# Altium PCB esp_slave.PcbDoc
Units mm, origin at the board's own origin, x right, y up, seen from the top; angles counter-clockwise.
Board outline 91.57 x 57.91 mm, 2 copper layers (Top Layer, Bottom Layer); 54 components, 18 nets, 198 pads, 0 vias.
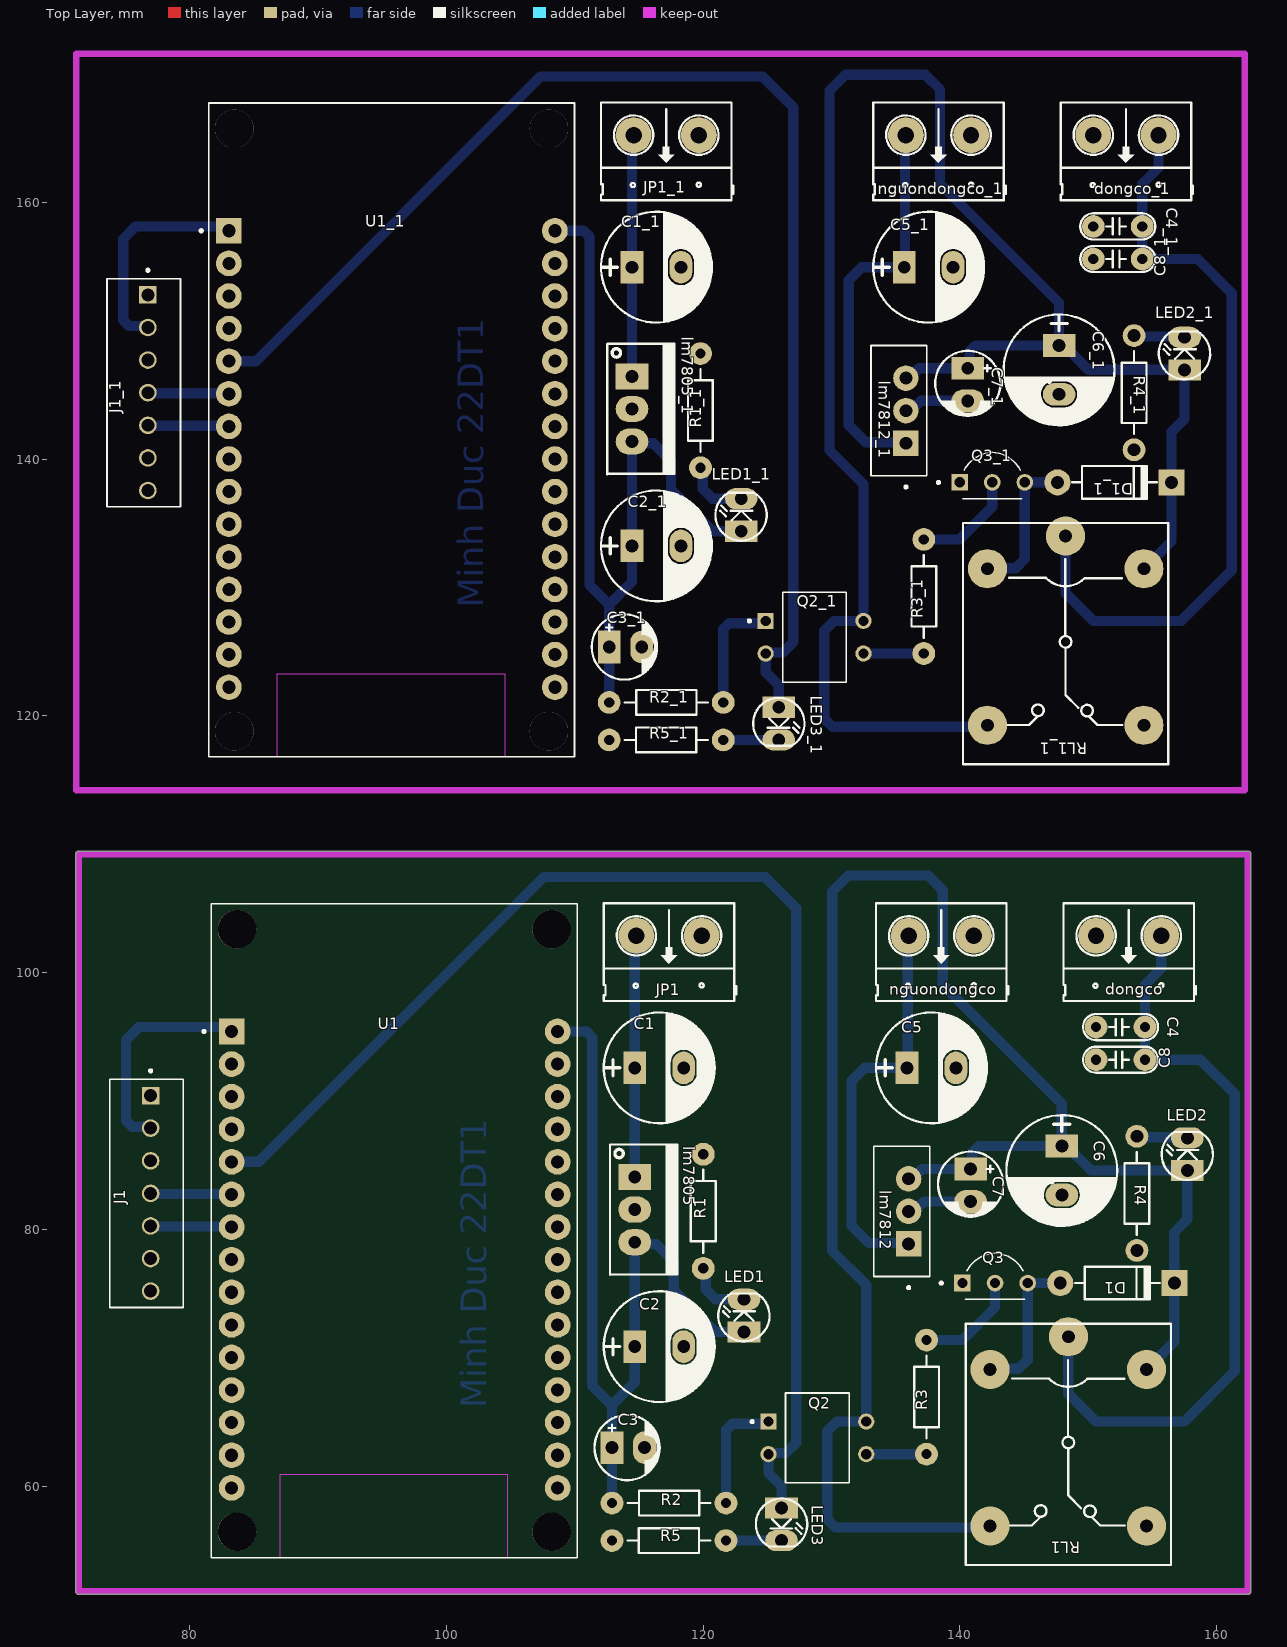
[diagram p0: Top Layer view]
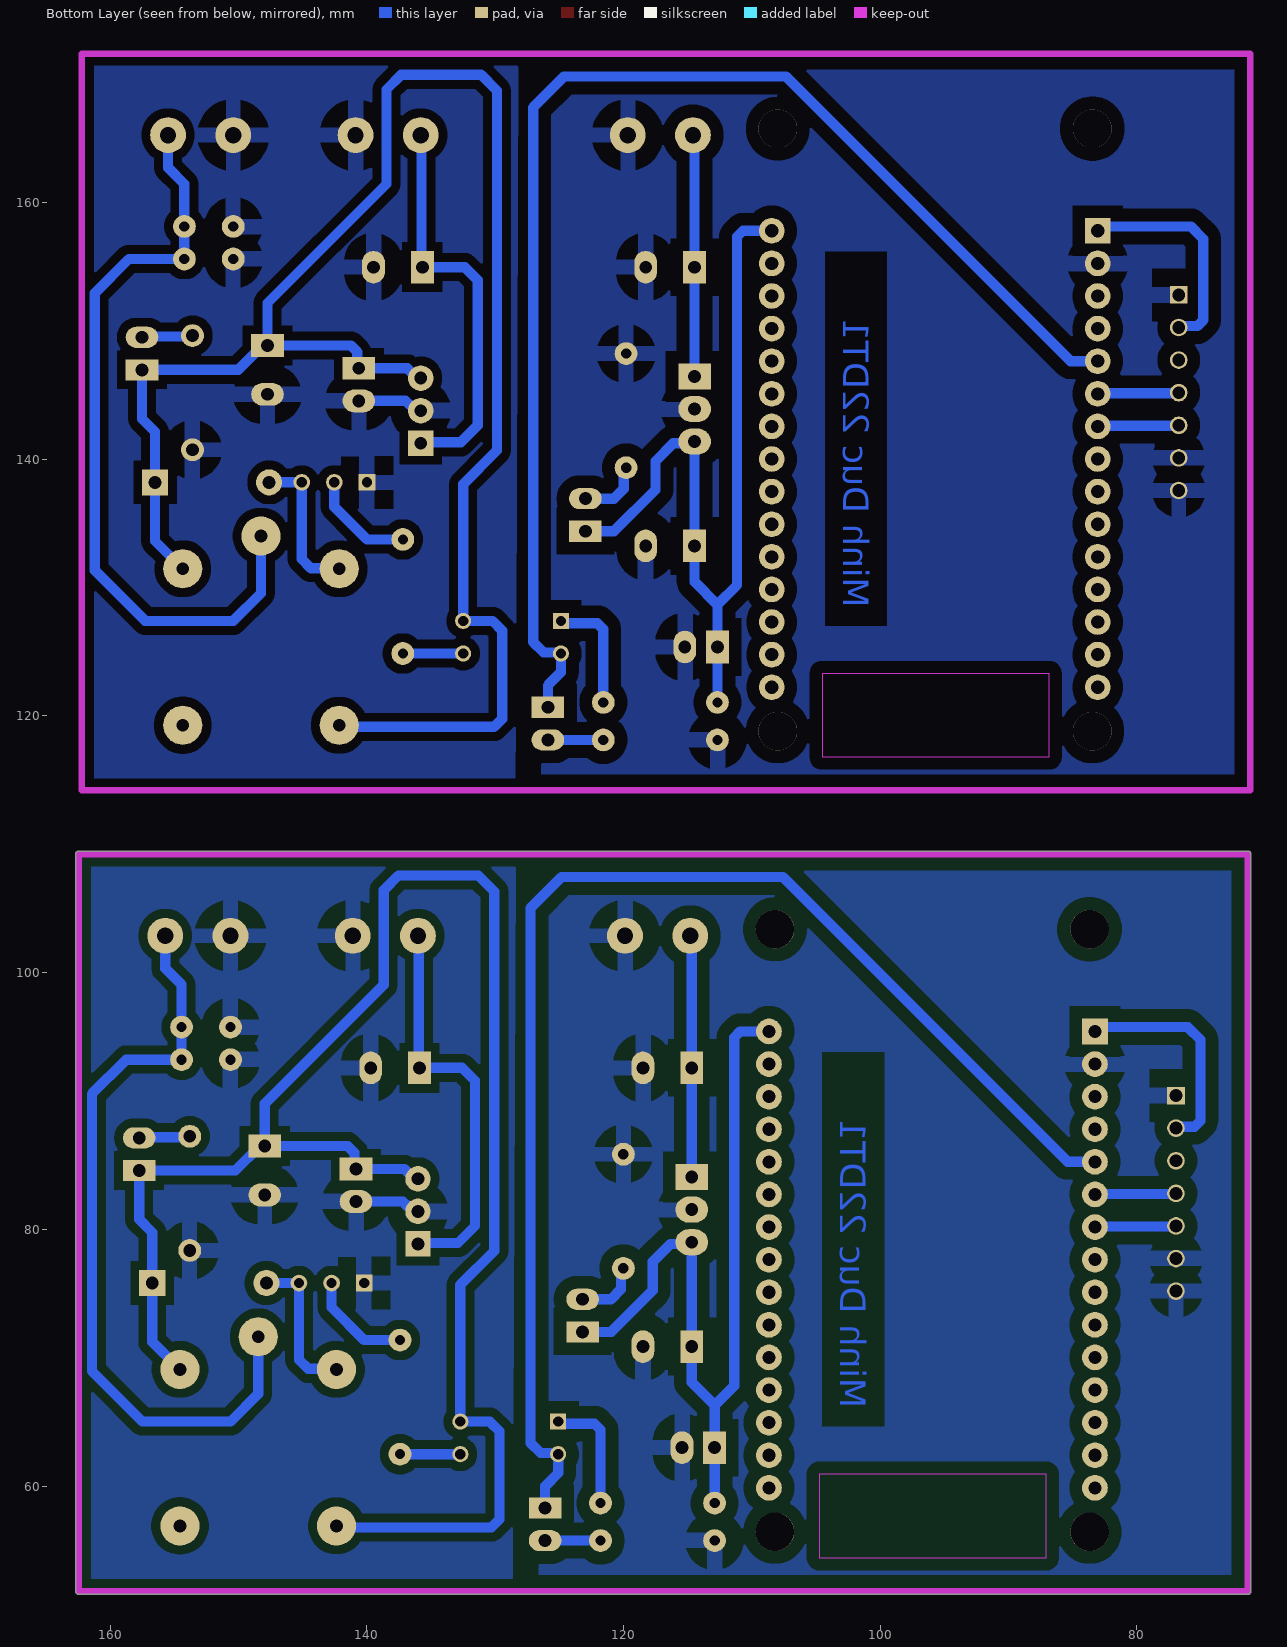
[diagram p1: Bottom Layer view, seen from below]

## Layer stack, top to bottom
Top Solder: solder mask 0.0102, Solder Resist, Dk 3.5
Top Layer: signal copper 0.0356
Dielectric 1: dielectric 0.32, FR-4, Dk 4.8
Bottom Layer: signal copper 0.0356
Bottom Solder: solder mask 0.0102, Solder Resist, Dk 3.5

## Board outline
71.12,51.816 ccw(c71.374,51.816) 71.374,51.562 162.433,51.562 ccw(c162.433,51.816) 162.687,51.816 162.687,109.22 ccw(c162.433,109.22) 162.433,109.474 71.374,109.474 ccw(c71.374,109.22) 71.12,109.22

## Design rules (kind name [scope] priority, off if disabled: settings)
Clearance [All] p1: gap=1 ignorepadtopadclearanceinfootprint=FALSE
PlaneConnect [All] p1: planeconnectstyle=Relief reliefexpansion=0.508 reliefentries=4 reliefconductorwidth=0.3 reliefairgap=0.4
PolygonConnect [All] p1: connectstyle=Relief reliefconductorwidth=1.2 reliefentries=4 polygonreliefangle="90 Angle" airgapwidth=1.4
RoutingVias [All] p1: holewidth=0.711 width=1.27 viastyle="Through Hole" minholewidth=0.711 minwidth=1.27 maxholewidth=0.711 maxwidth=1.27
SolderMaskExpansion [All] p1: expansion=0.102 istentingtop=FALSE
Width [All] p1: maxlimit=0.8 minlimit=0.8 preferedwidth=0.8
29 further rules are at their usual default settings.

## Classes and differential pairs
component class esp_slave: C1 C2 C3 C4 C5 C6 C7 C8 D1 dongco J1 JP1 LED1 LED2 LED3 lm7805 lm7812 nguondongco Q2 Q3 R1 R2 R3 R4 R5 RL1 U1

## Components (designator, comment, footprint, x,y, rotation, side; value= is the part's Value field where it differs from the comment)
C1 "100uF/35V" CP1.5/3.4 114.681,92.583 r0 top value=100uF/35V/50V
C1_1 "100uF/35V" CP1.5/3.4 114.465,154.961 r0 top value=100uF/35V/50V (schematic designator C1)
C2 "100uF/35V" CP1.5/3.4 114.681,70.866 r0 top value=100uF/35V/50V
C2_1 "100uF/35V" CP1.5/3.4 114.465,133.244 r0 top value=100uF/35V/50V (schematic designator C2)
C3 "10uF" CP1/2 112.903,62.992 r0 top value=10uF/50V
C3_1 "10uF" CP1/2 112.687,125.37 r0 top value=10uF/50V (schematic designator C3)
C4 "103" CN1.5 150.622,95.758 r0 top value=0.01uF
C4_1 "103" CN1.5 150.406,158.136 r0 top value=0.01uF (schematic designator C4)
C5 "100uF/35V" CP1.5/3.4 135.89,92.583 r0 top value=100uF/35V/50V
C5_1 "100uF/35V" CP1.5/3.4 135.674,154.961 r0 top value=100uF/35V/50V (schematic designator C5)
C6 "100uF/35V" CP1.5/3.4 147.955,86.487 r270 top value=100uF/35V/50V
C6_1 "100uF/35V" CP1.5/3.4 147.739,148.865 r270 top value=100uF/35V/50V (schematic designator C6)
C7 "10uF" CP1/2 140.843,84.709 r270 top value=10uF/50V
C7_1 "10uF" CP1/2 140.627,147.087 r270 top value=10uF/50V (schematic designator C7)
C8 "103" CN1.5 150.622,93.218 r0 top value=0.01uF
C8_1 "103" CN1.5 150.406,155.596 r0 top value=0.01uF (schematic designator C8)
D1 "1N4007" D1A 147.828,75.819 r180 top
D1_1 "1N4007" D1A 147.612,138.197 r180 top (schematic designator D1)
dongco "Header 2_1" HED2 155.702,102.87 r180 top value="Header 2"
dongco_1 "Header 2_1" HED2 155.486,165.248 r180 top value="Header 2" (schematic designator dongco)
J1 "640456-7" TE_640456-7 76.962,90.424 r90 top
J1_1 "640456-7" TE_640456-7 76.746,152.802 r90 top (schematic designator J1)
JP1 "Header 2_1" HED2 119.888,102.87 r180 top value="Header 2"
JP1_1 "Header 2_1" HED2 119.672,165.248 r180 top value="Header 2" (schematic designator JP1)
LED1 "LED" LED-3 123.19,72.009 r90 top value="LED 3 ly Single Colour"
LED1_1 "LED" LED-3 122.974,134.387 r90 top value="LED 3 ly Single Colour" (schematic designator LED1)
LED2 "LED" LED-3 157.734,84.582 r90 top value="LED 3 ly Single Colour"
LED2_1 "LED" LED-3 157.518,146.96 r90 top value="LED 3 ly Single Colour" (schematic designator LED2)
LED3 "LED" LED-3 126.111,58.293 r270 top value="LED 3 ly Single Colour"
LED3_1 "LED" LED-3 125.895,120.671 r270 top value="LED 3 ly Single Colour" (schematic designator LED3)
lm7805 "LM7805" QTO-220 114.681,84.074 r270 top
lm7805_1 "LM7805" QTO-220 114.465,146.452 r270 top (schematic designator lm7805)
lm7812 "LM7812CT" TO253P1057X470X2040-3 135.477,81.402 r90 top
lm7812_1 "LM7812CT" TO253P1057X470X2040-3 135.261,143.78 r90 top (schematic designator lm7812)
nguondongco "Header 2_1" HED2 141.097,102.87 r180 top value="Header 2"
nguondongco_1 "Header 2_1" HED2 140.881,165.248 r180 top value="Header 2" (schematic designator nguondongco)
Q2 "PC817-B" DIP762W50P254L650H455Q4B 128.905,63.754 r0 top
Q2_1 "PC817-B" DIP762W50P254L650H455Q4B 128.689,126.132 r0 top (schematic designator Q2)
Q3 "2N2222A" TO92254P470H750-3 142.748,78.149 r0 top
Q3_1 "2N2222A" TO92254P470H750-3 142.532,140.527 r0 top (schematic designator Q3)
R1 "Res1" R1/4W#1 120.015,76.962 r90 top value=330
R1_1 "Res1" R1/4W#1 119.799,139.34 r90 top value=330 (schematic designator R1)
R2 "Res1" R1/4W#1 112.903,58.674 r0 top value=2k2
R2_1 "Res1" R1/4W#1 112.687,121.052 r0 top value=2k2 (schematic designator R2)
R3 "Res1" R1/4W#2 137.414,62.484 r90 top value=1k
R3_1 "Res1" R1/4W#2 137.198,124.862 r90 top value=1k (schematic designator R3)
R4 "Res1" R1/4W#3 153.797,87.249 r270 top value=330
R4_1 "Res1" R1/4W#3 153.581,149.627 r270 top value=330 (schematic designator R4)
R5 "Res1" R1/4W#1 121.793,55.753 r180 top value=330
R5_1 "Res1" R1/4W#1 121.577,118.131 r180 top value=330 (schematic designator R5)
RL1 "Relay 10A/12V" RL_SPDT_10A 148.463,71.628 r270 top value="Relay SPDT, 10A, 12V"
RL1_1 "Relay 10A/12V" RL_SPDT_10A 148.247,134.006 r270 top value="Relay SPDT, 10A, 12V" (schematic designator RL1)
U1 "ESP32-DEVKIT-V1" MODULE_ESP32_DEVKIT_V1 95.973,79.903 r0 top
U1_1 "ESP32-DEVKIT-V1" MODULE_ESP32_DEVKIT_V1 95.757,142.281 r0 top (schematic designator U1)

## Footprints (in the part's own frame and the unit in brackets; to place one, negate y for a bottom-side part, rotate by r counter-clockwise, add the part's x,y. Pads: shape width x height; smd on the part's side, far side on the other; paste and mask are expansions set on the pad)
CN1.5 [mil]
  round 70 hole 31.5: 1(0,0) 2(150,0)
  silkscreen extent -40,-40 190,40, body extent -40,-33 190,33, height 235
CP1.5/3.4 [mm] "Tu hoa 220->470uF,16V, 470uF/16V,25V"
  rect 1.778x2.54 hole 1: 1(0,0)
  oval 1.778x2.54 hole 1: 2(3.81,0)
  silkscreen extent -2.41,-4.32 6.22,4.32, body extent -2.16,-4 5.84,4, height 11.33
CP1/2 [mm] "Tu hoa < 22uF/16>50V"
  rect 1.778x2.54 hole 1: 1(0,0)
  oval 1.778x2.54 hole 1: 2(2.54,0)
  silkscreen extent -1.36,-2.54 3.72,2.54, body extent -1.26,-2.53 3.8,2.53, height 7.29
D1A [mil] "Diode 1A, W 100mil, L 350mil"
  round 80 hole 39.37: 1(0,0)
  rect 80x80 hole 39.37: 2(-350,0)
  silkscreen extent -305,-50 -45,50, body extent -386,-33 34,36, height 84
DIP762W50P254L650H455Q4B [mm]
  rect 1.26x1.26 / inner round 1.26 / far side rect 1.26x1.26 hole 0.8: 1(-3.81,1.27)
  round 1.26 hole 0.8: 2(-3.81,-1.27) 3(3.81,-1.27) 4(3.81,1.27)
  silkscreen extent -5.18,-3.5 2.48,3.5, body extent -3.96,-2.29 3.96,2.29, height 4.8
HED2 [mil] "Header 2, 2 pin, hight 300mil, Pin to Pin 200, Colour Green"
  round 110 hole 50: 1(0,0) 2(200,0)
  silkscreen extent -106,-100 300,200, body extent -92,-140 302,155, height 394
LED-3 [mm] "LED 2 PIN, 3ly Only colour"
  rect 1.651x2.54 hole 1: 1(0,0)
  oval 1.651x2.54 hole 1: 2(2.54,0)
  silkscreen extent -0.73,-1.99 3,2.01, body extent -0.63,-1.9 2.87,1.9, height 5.52
MODULE_ESP32_DEVKIT_V1 [mm]
  rect 2x2 / inner round 2 / far side rect 2x2 hole 1.02: 1(-12.7,15.515)
  round 2 hole 1.02: 2(-12.7,12.975) 3(-12.7,10.435) 4(-12.7,7.895) 5(-12.7,5.355) 6(-12.7,2.815) 7(-12.7,0.275) 8(-12.7,-2.265) 9(-12.7,-4.805) 10(-12.7,-7.345) 11(-12.7,-9.885) 12(-12.7,-12.425) 13(-12.7,-14.965) 14(-12.7,-17.505) 15(-12.7,-20.045) 16(12.7,-20.045) 17(12.7,-17.505) 18(12.7,-14.965) 19(12.7,-12.425) 20(12.7,-9.885) 21(12.7,-7.345) 22(12.7,-4.805) 23(12.7,-2.265) 24(12.7,0.275) 25(12.7,2.815) 26(12.7,5.355) 27(12.7,7.895) 28(12.7,10.435) 29(12.7,12.975) 30(12.7,15.515)
  round 3 hole 3 unplated: ""(-12.28,-23.475) ""(-12.28,23.475) ""(12.23,-23.475) ""(12.23,23.475)
  Keep-Out Layer region: 8.78,-25.475 -8.91,-25.475 -8.91,-18.985 8.78,-18.985
  Keep-Out Layer region: 8.78,-25.475 -8.91,-25.475 -8.91,-18.985 8.78,-18.985
  silkscreen extent -14.95,-25.48 14.23,25.48, body extent -14.1,-25.9 14.1,26.55, height 7.05
QTO-220 [mm] "TO-220 - 1-2-3"
  rect 2.032x2.54 hole 1: 1(0,0)
  oval 2.032x2.54 hole 1: 2(2.54,0) 3(5.08,0)
  silkscreen extent -2.54,-1.93 7.62,3.3, body extent -3.02,-1.63 8.19,3.06, height 19.17
R1/4W#1 [mil] "R 1/4W, 2 Pin, 350mil"
  round 70 hole 31.5: 1(0,0) 2(350,0)
  silkscreen extent 48,-38 302,38, body extent -40,-47 386,47, height 111
R1/4W#2 [mil] "R 1/4W, 2 Pin, 350mil"
  round 70 hole 31: 1(0,0) 2(350,0)
  silkscreen extent 48,-38 302,38, body extent -40,-47 386,47, height 111
R1/4W#3 [mil] "R 1/4W, 2 Pin, 350mil"
  round 70 hole 39.37: 1(0,0) 2(350,0)
  silkscreen extent 48,-38 302,38, body extent -40,-47 386,47, height 111
RL_SPDT_10A [mil] "Relay SPDT, 5 pin, 10A,W 650mil, L 800mil, H 800mil"
  round 120 hole 39.37: 1(0,0) 2(580,240) 3(580,-240) 4(100,-240) 5(100,240)
  silkscreen extent -40,-315 700,315, body extent -46,-304 706,306, height 602
TE_640456-7 [mm]
  rect 1.37x1.37 / inner round 1.37 / far side rect 1.37x1.37 hole 1: 1(0,0)
  round 1.37 hole 1: 2(-2.54,0) 3(-5.08,0) 4(-7.62,0) 5(-10.16,0) 6(-12.7,0) 7(-15.24,0)
  silkscreen extent -16.51,-2.54 2.02,3.18, body extent -16.51,-2.54 1.27,3.17, height 10.03
TO253P1057X470X2040-3 [mm]
  rect 1.98x1.98 / inner round 1.98 / far side rect 1.98x1.98 hole 1: 1(-2.535,-0.54)
  round 1.98 hole 1: 2(0,-0.54) 3(2.535,-0.54)
  silkscreen extent -6.04,-2.17 5.08,2.17, body extent -5.1,-1.49 5.1,3.01, height 19.22
TO92254P470H750-3 [mm]
  rect 1.298x1.298 / inner round 1.298 / far side rect 1.298x1.298 hole 0.8: 1(-2.54,-2.33)
  round 1.298 hole 0.8: 2(0,-2.33) 3(2.54,-2.33)
  silkscreen extent -4.29,-3.6 2.3,0, body extent -2.74,-1.27 2.74,2.33, height 8.09

## Part data
C1 C1_1 C2 C2_1 C5 C5_1 C6 C6_1: library part CP3, "Cap 100uF/35V - 470uF/16V", Description 1="1000uF/6,3V - 470uF/16V - 330uF - 25V", Description 2="220uF/35V - 100uF/50V - 63V - 4,7uF/200V", Description 3="22uF => 33uF100V - 3,3uF => 4,7uF/250V", Description 4="2,2uF =>3,3uF/350 - 2,2uF/400V - 1uF/450V"
C3 C3_1 C7 C7_1: library part CP1, "Cap P  0,1uF < 22uF , 16 - 50V", Description 1="10 => 220uF/6,3V/10V - 10uF => 100uF/16V", Description 2="0,1uF => 33uF/50V - 10uF => 22uF/63V", Description 3="0,47uF => 10uF/100V"
C4 C4_1 C8 C8_1: library part CN1.5, "Cap np 682pF => 104pF"
D1 D1_1: library part D1A, "Diode 1A"
dongco dongco_1 JP1 JP1_1 nguondongco nguondongco_1: "Header, 2-Pin", Manufacturer="Generic Components", Class=Connector
J1 J1_1: "Header Friction Lock MTA-100 7 250 VAC Polyester Tin Copper Alloy Tin", Package=None, Check_prices=https://www.snapeda.com/parts/640456-7/TE+Connectivity+AMP+Connectors/view-part/?ref=eda, MF="TE Connectivity", MP=640456-7, SnapEDA_Link=https://www.snapeda.com/parts/640456-7/TE+Connectivity+AMP+Connectors/view-part/?ref=snap
LED1 LED1_1 LED2 LED2_1 LED3 LED3_1: "LED Single colour Green and Red"
lm7805 lm7805_1: library part LM78xx, "On ap +, from + 5 to + 24VDC"
lm7812 lm7812_1: "Linear Voltage Regulator IC Positive Fixed 1 Output 1A TO-220-3", Package="TO-220-3 ON", Check_prices=https://www.snapeda.com/parts/LM7812CT/Onsemi/view-part/?ref=eda, MF="ON Semiconductor", MP=LM7812CT, SnapEDA_Link=https://www.snapeda.com/parts/LM7812CT/Onsemi/view-part/?ref=snap
Q2 Q2_1: "Phototransistors 4-DIP (0.300, 7.62mm)", Package="DIP-4 American Bright", Check_prices=https://www.snapeda.com/parts/PC817-B/American+Bright/view-part/?ref=eda, MF="American Bright", MP=PC817-B, SnapEDA_Link=https://www.snapeda.com/parts/PC817-B/American+Bright/view-part/?ref=snap
Q3 Q3_1: "BJT, TO-92, 40V, 600mA, NPN, 0.625W, 150Â°C", Package="TO-92 Diotec", Check_prices=https://www.snapeda.com/parts/2N2222A/Diotec/view-part/?ref=eda, MF="Diotec Semiconductor", MP=2N2222A, SnapEDA_Link=https://www.snapeda.com/parts/2N2222A/Diotec/view-part/?ref=snap
R1 R1_1 R2 R2_1 R3 R3_1 R4 R4_1 R5 R5_1: library part Res1_4, "Resistor", Manufacturer="Generic Components", Class=Passive, Published=08/06/2000, Publisher="Altium Hobart Technology Centre", SubClass=Resistor
RL1 RL1_1: library part "Relay 1", "Relay SPDT,10A - 12VDC 5 Pin"
U1 U1_1: "Dual core, Wi-Fi: 2.4 GHz up to 150 Mbits/s,BLE (Bluetooth Low Energy) and legacy Bluetooth, 32 bits, Up to 240 MHz", Package=None, Check_prices=https://www.snapeda.com/parts/ESP32-DEVKIT-V1/Do+it/view-part/?ref=eda, MF="Do it", MP=ESP32-DEVKIT-V1, SnapEDA_Link=https://www.snapeda.com/parts/ESP32-DEVKIT-V1/Do+it/view-part/?ref=snap

## Nets (pads, with @x,y where several pads share a name; then routed paths per layer and width w, separated by ;. In a path a pad name is that pad's centre, name@x,y a point inside that pad or via, vN(x,y) a via of type N, cw(c..) or ccw(c..) an arc to the next point about the centre after c; other vN are vias at no path point)
5v: C2.1 C3.1 LED1.1 lm7805.3 R2.1 U1.30 | length 65.9
  Bottom Layer w0.8: U1.30 110.91,95.418 111.379,94.949 111.379,67.818 112.903,66.294 ; R2.1 C3.1 112.903,66.294 ; LED1.1 120.966,72.009 117.726,75.249 117.726,77.473 116.337,78.862 114.813,78.862 lm7805.3 114.681,78.294 C2.1 114.681,68.072 112.903,66.294
12v: C6.1 C7.1 D1.2 LED2.1 lm7812.3 Q2.4 RL1.3 RL1.5 | length 139.7
  Bottom Layer w0.8: lm7812.3 136.304,83.937 137.076,84.709 C7.1 140.97,84.836 140.97,85.979 141.478,86.487 C6.1@147.574,86.487 ; RL1.3 142.24,56.769 130.302,56.769 129.667,57.404 129.667,64.262 130.429,65.024 Q2.4 132.715,75.673 130.072,78.316 130.072,106.323 131.318,107.569 137.541,107.569 138.684,106.426 138.684,99.06 147.955,89.789 C6.1 148.336,86.487 150.241,84.582 LED2.1 157.734,80.772 156.718,79.756 156.718,71.247 RL1.5
am: C4.1 C5.2 C6.2 C7.2 C8.1 dongco.2 lm7812.2 nguondongco.1 Q3.1 R4.2 | length 5.1
  Bottom Layer w0.8: lm7812.2 136.336,81.402 136.781,81.847 136.883,81.847 137.205,82.169 C7.2
GND: C1.2 C2.2 C3.2 J1.1 J1.6 J1.7 JP1.1 lm7805.2 R1.2 R5.2 U1.2
NetC1_1: C1.1 JP1.2 lm7805.1 | length 18.8
  Bottom Layer w0.8: lm7805.1 C1.1 114.681,102.743 JP1.2
NetC4_2: C4.2 C8.2 dongco.1 RL1.1 | length 59.8
  Bottom Layer w0.8: RL1.1 148.463,67.183 150.622,65.024 157.48,65.024 161.417,68.961 161.417,90.551 158.75,93.218 C8.2 C4.2 154.432,99.06 155.702,100.33 dongco.1
NetD1_1: D1.1 Q3.3 RL1.4 | length 11.7
  Bottom Layer w0.8: RL1.4 142.414,69.135 144.573,69.135 145.288,69.85 Q3.3 D1.1
NetJ1_2: J1.2 U1.1 | length 17.2
  Bottom Layer w0.8: J1.2 76.853,87.993 75.521,87.993 75.052,88.462 75.052,94.776 76.034,95.758 82.933,95.758 U1.1
NetJ1_4: J1.4 U1.6 | length 6.3
  Bottom Layer w0.8: J1.4 77.005,82.761 83.23,82.761 U1.6
NetJ1_5: J1.5 U1.7 | length 6.3
  Bottom Layer w0.8: J1.5 77.005,80.221 83.23,80.221 U1.7
NetLED1_2: LED1.2 R1.1 | length 5
  Bottom Layer w0.8: R1.1 120.202,76.775 120.202,75.319 120.972,74.549 LED1.2
NetLED2_2: LED2.2 R4.1 | length 4
  Bottom Layer w0.8: R4.1 153.861,87.185 157.671,87.185 LED2.2
NetLED3_2: LED3.2 R5.1 | length 4.3
  Bottom Layer w0.8: R5.1 LED3.2
NetQ2_1: Q2.1 R2.2 | length 9.3
  Bottom Layer w0.8: R2.2 121.793,64.381 122.262,64.849 124.92,64.849 Q2.1
NetQ2_3: Q2.3 R3.1 | length 4.7
  Bottom Layer w0.8: Q2.3 R3.1
NetQ3_2: Q3.2 R3.2 | length 8.3
  Bottom Layer w0.8: R3.2 140.208,71.374 142.748,73.914 Q3.2
role: LED3.1 Q2.2 U1.5 | length 103
  Bottom Layer w0.8: U1.5 85.385,85.258 107.569,107.442 124.841,107.442 127.254,105.029 127.254,63.373 126.453,62.572 125.183,62.572 Q2.2 125.095,61.015 126.111,59.999 LED3.1
vin: C5.1 lm7812.1 nguondongco.2 | length 31.4
  Bottom Layer w0.8: lm7812.1 135.947,78.937 132.899,78.937 131.572,80.264 131.572,91.567 132.588,92.583 C5.1 135.953,92.647 135.953,102.806 nguondongco.2
pads on no net: C1_1.1 C1_1.2 C2_1.1 C2_1.2 C3_1.1 C3_1.2 C4_1.1 C4_1.2 C5_1.1 C5_1.2 C6_1.1 C6_1.2 C7_1.1 C7_1.2 C8_1.1 C8_1.2 D1_1.1 D1_1.2 dongco_1.1 dongco_1.2 J1.3 J1_1.1 J1_1.2 J1_1.3 J1_1.4 J1_1.5 J1_1.6 J1_1.7 JP1_1.1 JP1_1.2 LED1_1.1 LED1_1.2 LED2_1.1 LED2_1.2 LED3_1.1 LED3_1.2 lm7805_1.1 lm7805_1.2 lm7805_1.3 lm7812_1.1 lm7812_1.2 lm7812_1.3 nguondongco_1.1 nguondongco_1.2 Q2_1.1 Q2_1.2 Q2_1.3 Q2_1.4 Q3_1.1 Q3_1.2 Q3_1.3 R1_1.1 R1_1.2 R2_1.1 R2_1.2 R3_1.1 R3_1.2 R4_1.1 R4_1.2 R5_1.1 R5_1.2 RL1.2 RL1_1.1 RL1_1.2 RL1_1.3 RL1_1.4 RL1_1.5 U1. U1.3 U1.4 U1.8 U1.9 U1.10 U1.11 U1.12 U1.13 U1.14 U1.15 U1.16 U1.17 U1.18 U1.19 U1.20 U1.21 U1.22 U1.23 U1.24 U1.25 U1.26 U1.27 U1.28 U1.29 U1_1. U1_1.1 U1_1.2 U1_1.3 U1_1.4 U1_1.5 U1_1.6 U1_1.7 U1_1.8 U1_1.9 U1_1.10 U1_1.11 U1_1.12 U1_1.13 U1_1.14 U1_1.15 U1_1.16 U1_1.17 U1_1.18 U1_1.19 U1_1.20 U1_1.21 U1_1.22 U1_1.23 U1_1.24 U1_1.25 U1_1.26 U1_1.27 U1_1.28 U1_1.29 U1_1.30
copper on no net: | length 501
  Bottom Layer w0.8: 76.746,142.642 76.789,142.599 83.014,142.599 83.057,142.556 ; 76.746,145.182 76.789,145.139 83.014,145.139 83.057,145.096 ; 76.746,150.262 76.637,150.371 75.304,150.371 74.836,150.84 74.836,157.155 75.817,158.136 82.717,158.136 83.057,157.796 ; 83.057,147.636 85.169,147.636 107.353,169.82 124.625,169.82 127.038,167.407 127.038,125.751 126.237,124.95 124.967,124.95 124.879,124.862 124.879,123.393 125.895,122.377 125.895,120.671 ; 108.457,157.796 110.694,157.796 111.163,157.328 111.163,130.196 112.687,128.672 ; 112.687,121.052 112.687,125.37 112.687,128.672 ; 114.465,146.452 114.465,154.961 114.465,165.121 114.592,165.248 ; 119.799,139.34 119.986,139.153 119.986,137.697 120.756,136.927 122.974,136.927 ; 121.577,118.131 125.895,118.131 ; 121.577,121.052 121.577,126.759 122.045,127.228 124.704,127.228 124.879,127.402 ; 122.974,134.387 120.75,134.387 117.51,137.627 117.51,139.851 116.121,141.24 114.597,141.24 114.465,141.372 114.465,140.672 114.465,133.244 114.465,130.45 112.687,128.672 ; 132.499,124.862 137.198,124.862 ; 135.801,141.245 135.73,141.316 132.682,141.316 131.356,142.642 131.356,153.945 132.372,154.961 135.674,154.961 135.737,155.025 135.737,165.185 135.801,165.248 ; 135.801,143.78 136.12,143.78 136.565,144.225 136.667,144.225 136.989,144.547 140.627,144.547 ; 135.801,146.315 136.087,146.315 136.859,147.087 140.627,147.087 140.754,147.214 140.754,148.357 141.262,148.865 147.358,148.865 ; 137.198,133.752 139.992,133.752 142.532,136.292 142.532,138.197 ; 142.151,119.274 142.024,119.147 130.086,119.147 129.451,119.782 129.451,126.64 130.213,127.402 132.499,127.402 132.499,138.051 129.856,140.694 129.856,168.701 131.102,169.947 137.325,169.947 138.468,168.804 138.468,161.438 147.739,152.167 147.739,148.865 148.12,148.865 150.025,146.96 157.518,146.96 157.518,143.15 156.502,142.134 156.502,133.625 154.343,131.466 ; 142.151,131.466 142.198,131.513 144.357,131.513 145.072,132.228 145.072,138.197 147.612,138.197 ; 148.247,134.006 148.247,129.561 150.406,127.402 157.264,127.402 161.201,131.339 161.201,152.929 158.534,155.596 154.216,155.596 154.216,158.136 154.216,161.438 155.486,162.708 155.486,165.248 ; 153.581,149.627 153.644,149.564 157.454,149.564 157.518,149.5

## Polygon pours and split planes (outlines as drawn)
no net on Bottom Layer "NONET_L01_P-001" (solid, pour order 8): 128.181,171.598 162.09,171.598 162.09,114.194 128.435,114.194
no net on Bottom Layer "NONET_L01_P-001" (solid, pour order 7): 71.158,171.725 126.403,171.725 126.403,114.194 71.158,114.194
am on Bottom Layer "NONET_L01_P-001" (solid, pour order 4): 128.398,109.22 162.306,109.22 162.306,51.816 128.652,51.816
GND on Bottom Layer "NONET_L01_P-001" (solid, pour order 0): 71.374,109.347 126.619,109.347 126.619,51.816 71.374,51.816

## Keep-outs
Keep-Out Layer:
  lines w0.508: 71.158,114.194 162.217,114.194 162.217,171.598 71.158,171.598 71.158,114.194 ; 71.374,51.816 162.433,51.816 162.433,109.22 71.374,109.22 71.374,51.816

## Other copper
Bottom Layer:
  text "Minh Duc 22DT1" at 102.889,128.437 h2 r90
  text "Minh Duc 22DT1" at 103.105,66.059 h2 r90

## Silkscreen, mask and mechanical layers (free items; w line width, h text height)
Top Overlay:
  circle w0.2: c146.979,146.071 r0.1
  circle w0.2: c147.195,83.693 r0.1
Mechanical 13:
  circle w0.2: c146.979,146.071 r0.1
  circle w0.2: c147.195,83.693 r0.1